# Altium PCB DS_ZK_2.0.PcbDoc
Units mil, origin at the board's own origin, x right, y up, seen from the top; angles counter-clockwise.
Board outline 4965.93 x 2367.42 mil, 2 copper layers (Top Layer, Bottom Layer); 180 components, 153 nets, 779 pads, 4 vias.
Unrouted connection lines stored in the file: 470.
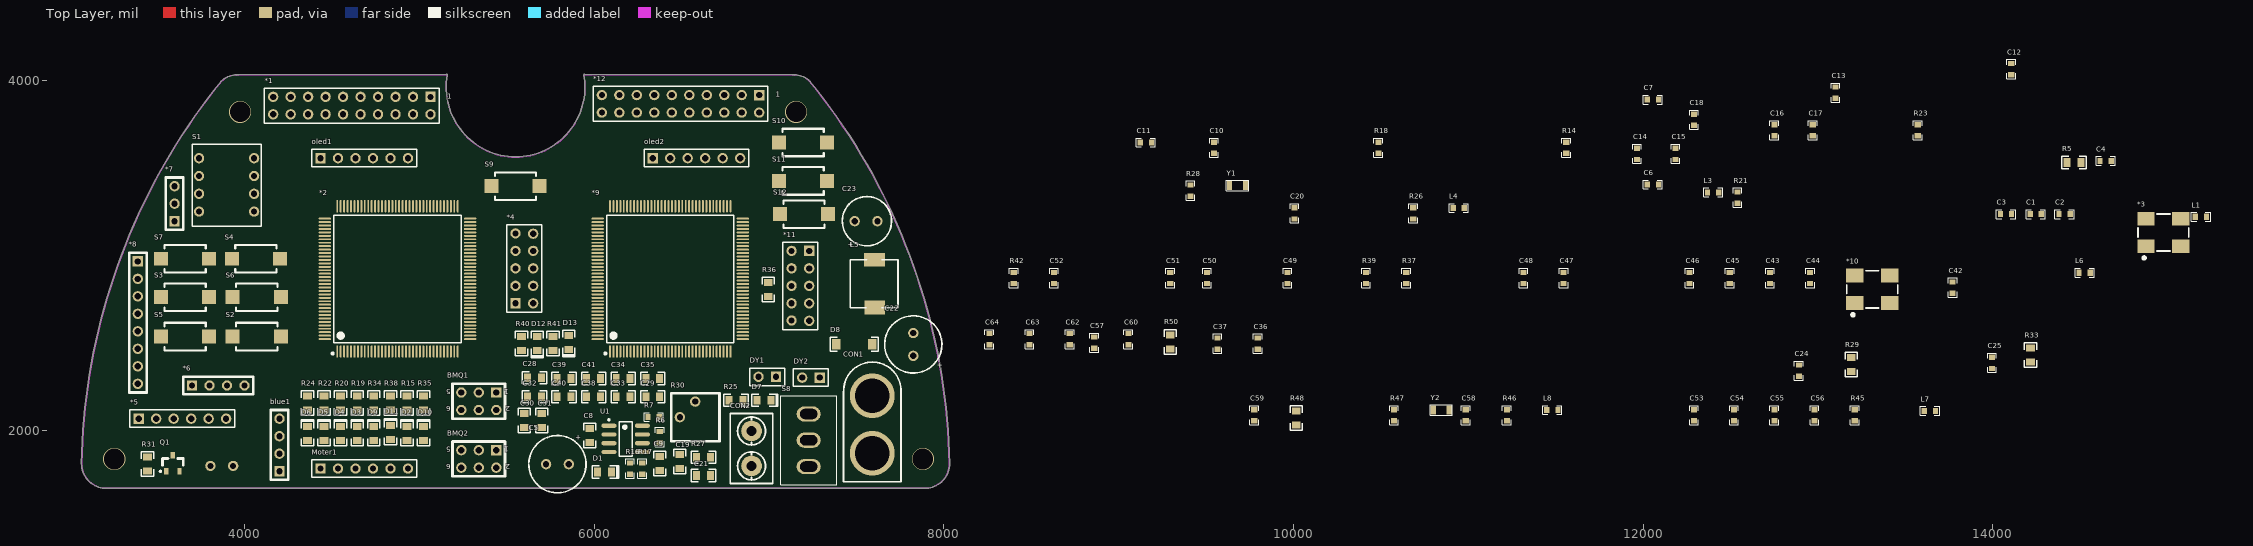
[diagram p0: Top Layer view]
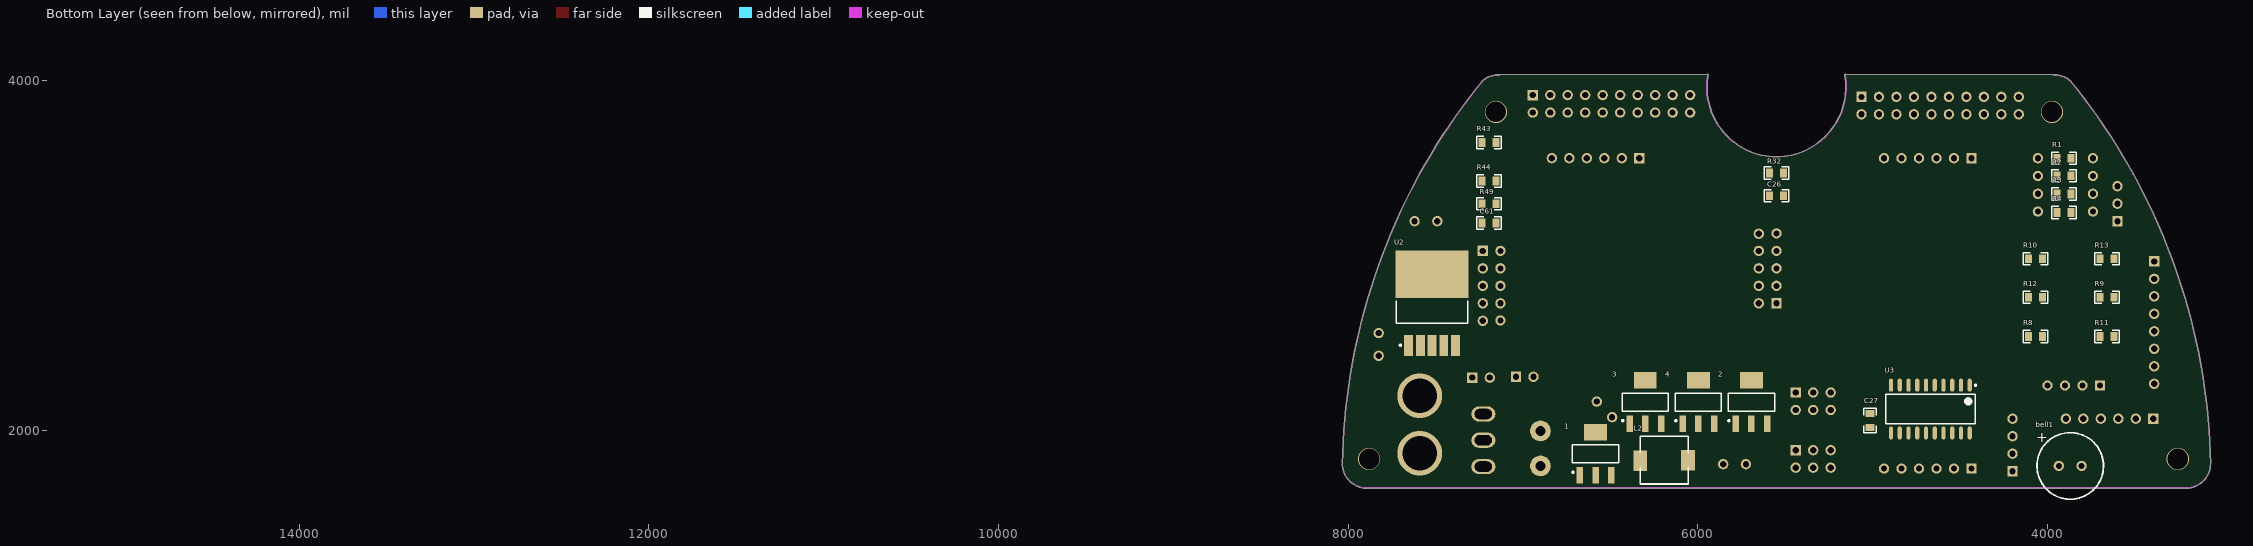
[diagram p1: Bottom Layer view, seen from below]

## Layer stack, top to bottom
Top Layer: signal copper 1.4
Dielectric: dielectric 12.6, FR-4, Dk 4.8
Bottom Layer: signal copper 1.4

## Board outline
3199.64,1667.51 3199.97,1667.51 ccw(c3207.53,1807.48) 3215.09,1667.51 5550.32,1667.48 7885.54,1667.51 ccw(c7893.1,1807.48) 7900.66,1667.51 7901,1667.51 ccw(c7901,1670.02) 7901.48,1667.55 ccw(c7893.1,1807.48) 8033.28,1806.92 ccw(c8030.77,1806.93) 8033.28,1806.93 ccw(c8030.77,1806.93) 8033.28,1806.97 ccw(c4458.04,1741.99) 7235.03,3994.74 ccw(c7232.81,3993.56) 7234.52,3995.41 ccw(c7138.46,3891.03) 7234.28,3995.62 ccw(c7138.46,3891.03) 7144.23,4032.77 ccw(c7144.08,4030.26) 7144.13,4032.77 ccw(c7144.08,4030.26) 7144.08,4032.77 7144.13,4032.77 ccw(c7138.46,3891.03) 7133.14,4032.78 5945.5,4034.24 ccw(c5944.02,4032.21) 5944.02,4034.72 ccw(c5944.02,4032.21) 5941.5,4032.15 5941.5,4031.72 ccw(c5944.02,4031.72) 5941.72,4030.69 cw(c5545.68,3963.89) 5947.32,3963.89 cw(c5545.68,3963.89) 5550.32,3562.28 ccw(c5554.95,3963.89) 5550.35,3562.28 5550.32,3562.28 cw(c5554.95,3963.89) 5158.91,4030.69 ccw(c5156.62,4031.72) 5159.13,4031.72 5159.13,4032.21 ccw(c5156.62,4032.21) 5156.62,4034.72 ccw(c5156.62,4032.21) 5155.13,4034.24 3967.49,4032.78 ccw(c3962.18,3891.03) 3956.5,4032.77 ccw(c3962.18,3891.03) 3956.4,4032.77 cw(c3956.55,4030.26) 3956.5,4032.77 cw(c3956.55,4030.26) 3956.55,4032.77 3956.4,4032.77 ccw(c3962.18,3891.03) 3866.35,3995.62 ccw(c3962.18,3891.03) 3866.11,3995.41 ccw(c3867.82,3993.56) 3865.6,3994.74 ccw(c6642.59,1741.99) 3067.35,1806.97 ccw(c3069.86,1806.93) 3067.35,1806.92 ccw(c3207.53,1807.48) 3199.16,1667.55 ccw(c3199.64,1670.02)

## Design rules (kind name [scope] priority, off if disabled: settings)
Clearance [All] p1: gap=8
ComponentClearance [All] p1 off: gap=10 collisioncheckmode=3 verticalgap=10 showdistances=FALSE
PolygonConnect [All] p1: connectstyle=Relief reliefconductorwidth=10 reliefentries=4 polygonreliefangle="90 Angle" airgapwidth=10
RoutingVias [All] p1: holewidth=15 width=30 viastyle="Through Hole" minholewidth=12 minwidth=24 maxholewidth=28 maxwidth=50
SolderMaskExpansion [All] p1: expansion=4
Width [All] p1: maxlimit=100 minlimit=10 preferedwidth=10
27 further rules are at their usual default settings.

## Components (designator, comment, footprint, x,y, rotation, side; value= is the part's Value field where it differs from the comment)
1 "AMS1117-adj" lm1117-5v 6590,1870 r90 bottom
2 "AMS1117-3.3" lm1117-5v 5698.33,2165 r90 bottom
3 "AMS1117-3.3" lm1117-5v 6305,2165 r90 bottom
4 "AMS1117-3.3" lm1117-5v 6001.67,2165 r90 bottom
*1 "SXT" SXT 4565,3860 r180 top
*2 "K66" LC-LQFP-144_20x20x05P 4875,2865 r0 top
*3 "晶振" LC-SMD-7050_4P 14975,3130 r0 top
*4 "JTAG" HDR2X5 5560,2900 r90 top
*5 "YK" HDR1X6 3395,2065 r0 top
*6 "6050" HDR1X4 3830,2275 r0 top
*7 "DJ" HDR1X3 3580,3305 r90 top
*8 "JG" HDR1X8 3430,2530 r270 top
*9 "K66" LC-LQFP-144_20x20x05P 6435,2865 r0 top
*10 "晶振" LC-SMD-7050_4P 13310,2805 r0 top
*11 "JTAG" HDR2X5 7220,2850 r270 top
*12 "SXT" SXT 6445,3870 r180 top
bell1 "Bell" bezzer 3975,1805 r180 bottom
blue1 "blueteeth2" HDR1X4 4180,1895 r90 top
BMQ1 "encode_1" HDR2X3 5250,2190 r180 top
BMQ2 "encode_2" HDR2X3 5250,1860 r180 top
C1 "Cap" 0603 14245,3235 r0 top
C2 "Cap" 0603 14410,3235 r0 top
C3 "Cap" 0603 14075,3235 r0 top
C4 "Cap" 0603 14645,3540 r0 top
C5 "470uF" 470UF 5775,1820 r180 top
C6 "Cap" 0603 12055,3405 r0 top
C7 "Cap" 0603 12055,3890 r0 top
C8 "470pF" 0805 5975,1970 r90 top
C9 "10uF" 0805 6375,1810 r270 top
C10 "Cap" 0603 9545,3615 r90 top
C11 "Cap" 0603 9155,3645 r0 top
C12 "Cap" 0603 14105,4065 r90 top
C13 "Cap" 0603 13100,3930 r90 top
C14 "Cap" 0603 11965,3580 r90 top
C15 "Cap" 0603 12185,3580 r90 top
C16 "Cap" 0603 12750,3715 r90 top
C17 "Cap" 0603 12970,3715 r90 top
C18 "Cap" 0603 12290,3775 r90 top
C19 "Cap" 0805 6490,1820 r90 top
C20 "Cap" 0603 10005,3240 r90 top
C21 "Cap" 0805 6625,1740 r0 top
C22 "Cap Pol1" 470uf 7840,2505 r90 top
C23 "Cap Pol1" 220uf 7580,3235 r0 top
C24 "Cap" 0603 12890,2340 r90 top
C25 "Cap" 0603 13995,2385 r90 top
C26 "Cap" 0805 5550,3340 r180 bottom
C27 "0.1uF" 0805 5015,2055 r90 bottom
C28 "Cap Pol1" 0805 5660,2300 r180 top
C29 "Cap Pol1" 0805 6335,2190 r0 top
C30 "Cap" 0805 5600,2055 r270 top
C31 "Cap" 0805 5700,2055 r270 top
C32 "Cap" 0805 5660,2190 r0 top
C33 "Cap" 0805 6166.25,2190 r180 top
C34 "Cap" 0805 6166.25,2295 r180 top
C35 "Cap" 0805 6335,2295 r180 top
C36 "Cap" 0603 9795,2495 r90 top
C37 "Cap" 0603 9565,2495 r90 top
C38 "Cap Pol1" 0805 5997.5,2190 r0 top
C39 "Cap" 0805 5828.75,2295 r0 top
C40 "Cap" 0805 5828.75,2190 r0 top
C41 "Cap" 0805 5997.5,2295 r180 top
C42 "Cap" 0603 13770,2815 r90 top
C43 "Cap" 0603 12725,2870 r90 top
C44 "Cap" 0603 12955,2870 r90 top
C45 "Cap" 0603 12495,2870 r90 top
C46 "Cap" 0603 12265,2870 r90 top
C47 "Cap" 0603 11545,2870 r90 top
C48 "Cap" 0603 11315,2870 r90 top
C49 "Cap" 0603 9965,2870 r90 top
C50 "Cap" 0603 9505,2870 r90 top
C51 "Cap" 0603 9295,2870 r90 top
C52 "Cap" 0603 8630,2870 r90 top
C53 "Cap" 0603 12290,2085 r90 top
C54 "Cap" 0603 12520,2085 r90 top
C55 "Cap" 0603 12750,2085 r90 top
C56 "Cap" 0603 12980,2085 r90 top
C57 "Cap" 0603 8860,2500 r270 top
C58 "Cap" 0603 10985,2085 r90 top
C59 "Cap" 0603 9775,2085 r90 top
C60 "Cap" 0603 9055,2520 r90 top
C61 "Cap" 0805 7195,3185 r180 bottom
C62 "Cap" 0603 8720,2520 r90 top
C63 "Cap" 0603 8490,2520 r90 top
C64 "Cap" 0603 8260,2520 r90 top
CON1 "PowerIn" DIZUO 7580,2025 r0 top
CON2 "PoweIn" KF301-2P 6900,1895 r0 top
D1 "IN5819" 0805LED 6060,1760 r0 top
D2 "LED0" 0805LED 4929.29,1980 r90 top
D3 "LED0" 0805LED 4644.64,1980 r90 top
D4 "LED0" 0805LED 4549.76,1980 r90 top
D5 "LED0" 0805LED 4454.88,1980 r90 top
D6 "LED0" 0805LED 4360,1980 r90 top
D7 "RED" 0805LED 6970,2170 r0 top
D8 "IN5824" 1N5824 7550,2645 r180 top
D9 "LED0" 0805LED 4739.52,1980 r90 top
D10 "LED0" 0805LED 5024.17,1980 r90 top
D11 "LED0" 0805LED 4834.4,1985 r90 top
D12 "LED0" 0805LED 5675,2495 r270 top
D13 "LED0" 0805LED 5855,2500 r270 top
DY1 "H1" HDR1X2 7020,2285 r180 top
DY2 "H1" HDR1X2 7270,2280 r180 top
L1 "Inductor" 0603 15190,3220 r0 top
L2 "330uH" diangan 6030,1905 r180 bottom
L3 "Inductor" 0603 12400,3360 r0 top
L4 "Inductor" 0603 10945,3270 r0 top
L5 "Inductor" diangan 7525,3000 r90 top
L6 "Inductor" 0603 14525,2900 r0 top
L7 "Inductor" 0603 13640,2110 r0 top
L8 "Inductor" 0603 11480,2115 r0 top
Moter1 "Motor" HDR1X6 4435,1780 r0 top
oled1 "OLED" HDR1X6 4435,3555 r0 top
oled2 "OLED" HDR1X6 6335,3555 r0 top
Q1 "NPN9013" npn9013 3580,1805 r90 top
R1 "Res2" 0805 3905,3555 r180 bottom
R2 "Res2" 0805 3905,3455 r180 bottom
R3 "Res2" 0805 3905,3350 r180 bottom
R4 "Res2" 0805 3905,3245 r0 bottom
R5 "Res2" 0805 14465,3530 r0 top
R6 "0.22R" 0603 6375,1960 r270 top
R7 "180R" 0603 6340,2075 r0 top
R8 "Res2" 0805 4070,2535 r180 bottom
R9 "Res2" 0805 3660,2760 r180 bottom
R10 "Res2" 0805 4070,2980 r180 bottom
R11 "Res2" 0805 3660,2535 r180 bottom
R12 "Res2" 0805 4070,2760 r180 bottom
R13 "Res2" 0805 3660,2980 r180 bottom
R14 "Res2" 0603 11560,3615 r90 top
R15 "Res2" 0805 4929.29,2155 r90 top
R16 "1.3K" 0603 6205,1780 r270 top
R17 "100R" 0603 6275,1780 r270 top
R18 "Res2" 0603 10485,3615 r90 top
R19 "Res2" 0805 4644.64,2155 r90 top
R20 "Res2" 0805 4549.76,2155 r90 top
R21 "Res2" 0603 12540,3330 r90 top
R22 "Res2" 0805 4454.88,2155 r90 top
R23 "Res2" 0603 13570,3715 r90 top
R24 "Res2" 0805 4360,2155 r90 top
R25 "Res2" 0805 6810,2170 r180 top
R26 "Res2" 0603 10685,3240 r90 top
R27 "Res2" 0805 6625,1845 r180 top
R28 "Res2" 0603 9410,3370 r90 top
R29 "Res2" 0805 13190,2375 r90 top
R30 "Res2" 1*2 6545,2105 r0 top
R31 "Res2" 0805 3445,1805 r270 top
R32 "Res2" 0805 5550,3470 r180 bottom
R33 "Res2" 0805 14215,2430 r90 top
R34 "Res2" 0805 4739.52,2155 r90 top
R35 "Res2" 0805 5024.17,2155 r90 top
R36 "Res2" 0805 6995,2805 r90 top
R37 "Res2" 0603 10645,2870 r90 top
R38 "Res2" 0805 4834.4,2155 r90 top
R39 "Res2" 0603 10415,2870 r90 top
R40 "Res2" 0805 5585,2495 r90 top
R41 "Res2" 0805 5765,2495 r90 top
R42 "Res2" 0603 8400,2870 r90 top
R43 "Res2" 0805 7195,3645 r0 bottom
R44 "Res2" 0805 7195,3425 r0 bottom
R45 "Res2" 0603 13210,2085 r90 top
R46 "Res2" 0603 11220,2085 r90 top
R47 "Res2" 0603 10575,2085 r90 top
R48 "Res2" 0805 10015,2070 r90 top
R49 "Res2" 0805 7195,3295 r180 bottom
R50 "Res2" 0805 9295,2505 r90 top
S1 "SW-DIP4" BMKG 3400,3510 r270 top
S2 "SW-PB" BUTTON 4110,2555 r0 top
S3 "SW-PB" BUTTON 3700,2780 r0 top
S4 "SW-PB" BUTTON 4105,3000 r0 top
S5 "SW-PB" BUTTON 3700,2555 r0 top
S6 "SW-PB" BUTTON 4110,2780 r0 top
S7 "SW-PB" BUTTON 3700,3000 r0 top
S8 "zk" SWITCH-MID 7105,1710 r90 top
S9 "SW-PB" BUTTON 5510,3375 r180 top
S10 "SW-PB" BUTTON 7155,3625 r180 top
S11 "SW-PB" BUTTON 7155,3405 r180 top
S12 "SW-PB" BUTTON 7160,3215 r180 top
U1 "MC34063" MC34063 6180,1950 r0 top
U2 "LM2596-5" LM2596 7510,2725 r90 bottom
U3 "74LS244" 74ls244DA 4640,2200 r270 bottom
Y1 "XTAL" 32.768 9735,3385 r0 top
Y2 "XTAL" 32.768 10900,2100 r0 top

## Footprints (in the part's own frame and the unit in brackets; to place one, negate y for a bottom-side part, rotate by r counter-clockwise, add the part's x,y. Pads: shape width x height; smd on the part's side, far side on the other; paste and mask are expansions set on the pad)
1*2 [mm]
  round 1.5 hole 0.9: 1(-1.397,-0.787) 2(0.838,1.473)
  silkscreen extent -2.67,-4.29 4.37,2.67
1N5824 [mil]
  rect 50x60 smd: 1(-40,155) 2(165,155)
  silkscreen extent -75,115 200,195
32.768 [mil]
  rect 29.53x51.18 smd: 1(-101,14) 2(-9,14)
  silkscreen extent -119,-16 9,44
74ls244DA [mm]
  oval 1.9x0.6 smd: 1(-1.443,4.953) 2(-1.443,3.683) 3(-1.443,2.413) 4(-1.443,1.143) 5(-1.443,-0.127) 6(-1.443,-1.397) 7(-1.443,-2.667) 8(-1.443,-3.937) 9(-1.443,-5.207) 10(-1.443,-6.477) 11(5.507,-6.477) 12(5.507,-5.207) 13(5.507,-3.937) 14(5.507,-2.667) 15(5.507,-1.397) 16(5.507,-0.127) 17(5.507,1.143) 18(5.507,2.413) 19(5.507,3.683) 20(5.507,4.953)
  silkscreen extent -1.57,-7.26 4.16,5.93, body extent -0.77,-7.26 4.83,5.74, height 2.2
220uf [mm]
  round 1.5 hole 0.9: 1(-2.286,-1.016) 2(1.016,-1.016)
  silkscreen extent -4.08,-4.59 3.07,2.56
470UF [mm]
  round 1.5 hole 0.9: 1(-2.032,0.381) 2(1.27,0.381)
  silkscreen extent -4.54,-3.78 3.78,4.54
470uf [mm]
  round 1.5 hole 0.9: 1(-2.032,0.381) 2(1.27,0.381)
  silkscreen extent -4.54,-3.78 3.78,4.54
0603 [mil]
  rect 30x35 smd: 1(-32,0) 2(32,0)
  silkscreen extent -55,-25 55,25
0805 [mil]
  rect 40x50 smd: 1(-40,0) 2(40,0)
  silkscreen extent -70,-35 70,35
0805LED [mil]
  rect 40x50 smd: 1(-40,0) 2(40,0)
  silkscreen extent -70,-35 80,35
bezzer [mm]
  round 1.5 hole 0.9: 1(1.016,-0.254) 2(4.318,-0.254)
  silkscreen extent -2.16,-5.08 7.5,4.58
BMKG [mm]
  round 1.5 hole 0.9: 1(-1.143,8.636) 2(1.439,8.636) 3(4.022,8.636) 4(6.604,8.636) 5(6.604,16.637) 6(4.022,16.637) 7(1.439,16.637) 8(-1.143,16.637)
  silkscreen extent -3.18,7.62 8.76,17.65
BUTTON [mil]
  rect 80x80 smd: 1(-177.8,-20) 2(97.8,-20)
  silkscreen extent -158,-99 78,59
diangan [mil]
  rect 78.74x118.11 smd: 1(-299,-80) 2(-26,-78)
  silkscreen extent -300,-213 -25,60
DIZUO [mm]
  round 6.5 hole 5: 1(0.279,4.343) 2(0.279,-3.988)
  silkscreen extent -3.91,-8.13 4.45,9.25
HDR1X2 [mm]
  rect 1.5x1.5 hole 0.9: 1(-0.508,-0.508)
  round 1.5 hole 0.9: 2(2.032,-0.508)
  silkscreen extent -1.78,-1.78 3.3,0.76
HDR1X3 [mm]
  rect 1.5x1.5 hole 0.9: 1(-2.794,-0.508)
  round 1.5 hole 0.9: 2(-0.254,-0.508) 3(2.286,-0.508)
  silkscreen extent -4.06,-1.78 3.56,0.76
HDR1X4 [mm]
  rect 1.5x1.5 hole 0.9: 1(-3.302,-0.508)
  round 1.5 hole 0.9: 2(-0.762,-0.508) 3(1.778,-0.508) 4(4.318,-0.508)
  silkscreen extent -4.57,-1.78 5.59,0.76
HDR1X6 [mm] "Connector; Header; 6 Position"
  rect 1.5x1.5 hole 0.9: 1(0,0)
  round 1.5 hole 0.9: 2(2.54,0) 3(5.08,0) 4(7.62,0) 5(10.16,0) 6(12.7,0)
  silkscreen extent -1.27,-1.27 13.97,1.27
HDR1X8 [mm]
  rect 1.5x1.5 hole 0.9: 1(-11.049,-1.016)
  round 1.5 hole 0.9: 2(-8.509,-1.016) 3(-5.969,-1.016) 4(-3.429,-1.016) 5(-0.889,-1.016) 6(1.651,-1.016) 7(4.191,-1.016) 8(6.731,-1.016)
  silkscreen extent -12.32,-2.29 8,0.25
HDR2X3 [mm]
  rect 1.5x1.5 hole 0.9: 1(-4.826,-0.635)
  round 1.5 hole 0.9: 2(-4.826,1.905) 3(-2.286,-0.635) 4(-2.286,1.905) 5(0.254,-0.635) 6(0.254,1.905)
  silkscreen extent -6.1,-1.91 1.52,3.18
HDR2X5 [mm]
  rect 1.5x1.5 hole 0.9: 1(-4.445,0.254)
  round 1.5 hole 0.9: 2(-1.905,0.254) 3(0.635,0.254) 4(3.175,0.254) 5(5.715,0.254) 6(5.664,-2.311) 7(3.175,-2.311) 8(0.635,-2.311) 9(-1.905,-2.311) 10(-4.445,-2.311)
  silkscreen extent -5.71,-3.58 6.98,1.52
KF301-2P [mm]
  round 3 hole 1.5: 1(0,-2.54) 2(0,2.54)
  silkscreen extent -3.1,-5.08 3.1,5.08
LC-LQFP-144_20x20x05P [mm]
  oval 0.28x1.8 smd mask+0.051: 1(-8.75,-10.55) 2(-8.25,-10.55) 3(-7.75,-10.55) 4(-7.25,-10.55) 5(-6.75,-10.55) 6(-6.25,-10.55) 7(-5.75,-10.55) 8(-5.25,-10.55) 9(-4.75,-10.55) 10(-4.25,-10.55) 11(-3.75,-10.55) 12(-3.25,-10.55) 13(-2.75,-10.55) 14(-2.25,-10.55) 15(-1.75,-10.55) 16(-1.25,-10.55) 17(-0.75,-10.55) 18(-0.25,-10.55) 19(0.25,-10.55) 20(0.75,-10.55) 21(1.25,-10.55) 22(1.75,-10.55) 23(2.25,-10.55) 24(2.75,-10.55) 25(3.25,-10.55) 26(3.75,-10.55) 27(4.25,-10.55) 28(4.75,-10.55) 29(5.25,-10.55) 30(5.75,-10.55) 31(6.25,-10.55) 32(6.75,-10.55) 33(7.25,-10.55) 34(7.75,-10.55) 35(8.25,-10.55) 36(8.75,-10.55) 73(8.75,10.55) 74(8.25,10.55) 75(7.75,10.55) 76(7.25,10.55) 77(6.75,10.55) 78(6.25,10.55) 79(5.75,10.55) 80(5.25,10.55) 81(4.75,10.55) 82(4.25,10.55) 83(3.75,10.55) 84(3.25,10.55) 85(2.75,10.55) 86(2.25,10.55) 87(1.75,10.55) 88(1.25,10.55) 89(0.75,10.55) 90(0.25,10.55) 91(-0.25,10.55) 92(-0.75,10.55) 93(-1.25,10.55) 94(-1.75,10.55) 95(-2.25,10.55) 96(-2.75,10.55) 97(-3.25,10.55) 98(-3.75,10.55) 99(-4.25,10.55) 100(-4.75,10.55) 101(-5.25,10.55) 102(-5.75,10.55) 103(-6.25,10.55) 104(-6.75,10.55) 105(-7.25,10.55) 106(-7.75,10.55) 107(-8.25,10.55) 108(-8.75,10.55)
  oval 1.8x0.28 smd mask+0.051: 37(10.55,-8.75) 38(10.55,-8.25) 39(10.55,-7.75) 40(10.55,-7.25) 41(10.55,-6.75) 42(10.55,-6.25) 43(10.55,-5.75) 44(10.55,-5.25) 45(10.55,-4.75) 46(10.55,-4.25) 47(10.55,-3.75) 48(10.55,-3.25) 49(10.55,-2.75) 50(10.55,-2.25) 51(10.55,-1.75) 52(10.55,-1.25) 53(10.55,-0.75) 54(10.55,-0.25) 55(10.55,0.25) 56(10.55,0.75) 57(10.55,1.25) 58(10.55,1.75) 59(10.55,2.25) 60(10.55,2.75) 61(10.55,3.25) 62(10.55,3.75) 63(10.55,4.25) 64(10.55,4.75) 65(10.55,5.25) 66(10.55,5.75) 67(10.55,6.25) 68(10.55,6.75) 69(10.55,7.25) 70(10.55,7.75) 71(10.55,8.25) 72(10.55,8.75) 109(-10.55,8.75) 110(-10.55,8.25) 111(-10.55,7.75) 112(-10.55,7.25) 113(-10.55,6.75) 114(-10.55,6.25) 115(-10.55,5.75) 116(-10.55,5.25) 117(-10.55,4.75) 118(-10.55,4.25) 119(-10.55,3.75) 120(-10.55,3.25) 121(-10.55,2.75) 122(-10.55,2.25) 123(-10.55,1.75) 124(-10.55,1.25) 125(-10.55,0.75) 126(-10.55,0.25) 127(-10.55,-0.25) 128(-10.55,-0.75) 129(-10.55,-1.25) 130(-10.55,-1.75) 131(-10.55,-2.25) 132(-10.55,-2.75) 133(-10.55,-3.25) 134(-10.55,-3.75) 135(-10.55,-4.25) 136(-10.55,-4.75) 137(-10.55,-5.25) 138(-10.55,-5.75) 139(-10.55,-6.25) 140(-10.55,-6.75) 141(-10.55,-7.25) 142(-10.55,-7.75) 143(-10.55,-8.25) 144(-10.55,-8.75)
  silkscreen extent -9.57,-11 9.25,9.25
LC-SMD-7050_4P [mm]
  rect 2.5x2 smd: 1(-2.54,-2) 2(2.54,-2) 3(2.54,2) 4(-2.54,2)
  silkscreen extent -3.7,-3.9 3.7,2.7
lm1117-5v [mm]
  rect 2.4x0.95 smd: 1(-3.277,2.173) 2(-3.277,-0.127) 3(-3.277,-2.427)
  rect 2.4x3.3 smd: 2(3.023,-0.127)
  silkscreen extent -2.95,-3.48 1.17,3.28, body extent -1.63,-3.48 1.37,3.22, height 1.8
LM2596 [mm]
  rect 3.05x1.3 smd: 1(-6.1,3.654) 2(-6.1,1.954) 3(-6.1,0.254) 4(-6.1,-1.446) 5(-6.1,-3.146)
  rect 6.9x10.65 smd: 6(4.25,0.254)
  silkscreen extent -6.22,-4.95 0.4,5.45
MC34063 [mm] "SOIC, 8-Leads, Body 4.90x3.90mm, Pitch 1.27mm, IPC Medium Density"
  oval 2.2x0.6 smd: 1(-2.425,1.905) 2(-2.425,0.635) 3(-2.425,-0.635) 4(-2.425,-1.905) 5(2.425,-1.905) 6(2.425,-0.635) 7(2.425,0.635) 8(2.425,1.905)
  silkscreen extent -2.55,-2.5 0.93,2.88, body extent -2,-2.5 2,2.5, height 1.5
npn9013 [mm]
  rect 0.95x0.6 smd: 1(-1.048,-1.204) 2(-1.048,0.696) 3(1.302,-0.254)
  silkscreen extent -1.17,-1.75 0.83,1.67, body extent -0.57,-1.75 0.83,1.25, height 1.1
SWITCH-MID [mm]
  oval 2.2x3.5 hole 1.5 slot 2.5 at 90 deg: 1(9.703,-3.099) 2(5.893,-3.099) ""(2.057,-3.099)
  silkscreen extent -0.56,-7.16 12.34,0.94
SXT [mm]
  rect 1.5x1.5 hole 0.9: 1(-12.675,-1.168)
  round 1.5 hole 0.9: 2(-10.135,-1.168) 3(-7.595,-1.168) 4(-5.055,-1.168) 5(-2.515,-1.168) 6(0.025,-1.168) 7(2.565,-1.168) 8(5.105,-1.168) 9(7.645,-1.168) 10(10.185,-1.168) 11(10.185,1.372) 12(7.645,1.372) 13(5.105,1.372) 14(2.565,1.372) 15(0.025,1.372) 16(-2.515,1.372) 17(-5.055,1.372) 18(-7.595,1.372) 19(-10.135,1.372) 20(-12.675,1.372)
  silkscreen extent -13.94,-2.44 11.46,2.64

## Part data
1 2 3 4: library part LT1117-3.3
*1 *12: library part 摄像头
*5: library part 遥控
*7: library part 舵机
*8: library part 激光
bell1: "Electrical Bell"
blue1: library part blueteeth
BMQ1 BMQ2: library part encode
C1 C2 C3 C4 C6 C7 C10 C11 C12 C13 C14 C15 C16 C17 C18 C19 C20 C21 C24 C25 C26 C30 C31 C32 C33 C34 C35 C36 C37 C39 C40 C41 C42 C43 C44 C45 C46 C47 C48 C49 C50 C51 C52 C53 C54 C55 C56 C57 C58 C59 C60 C61 C62 C63 C64: "Capacitor"
C5 C9: library part "Cap Pol3", "Polarized Capacitor (Surface Mount)"
C8 C27: library part "Cap Semi", "Capacitor (Semiconductor SIM Model)"
C22 C23 C28 C29 C38: "Polarized Capacitor (Radial)"
CON1 CON2: library part "Header 2", "Header, 2-Pin"
D1: library part Diode, "Default Diode"
D2 D3 D4 D5 D6 D9 D10 D11 D12 D13: "Typical INFRARED GaAs LED"
D7: library part LED2, "Typical RED, GREEN, YELLOW, AMBER GaAs LED"
L2: library part Inductor, "Inductor"
Q1: library part 2N3904, "NPN General Purpose Amplifier"
R1 R2 R3 R4 R5 R8 R9 R10 R11 R12 R13 R14 R15 R18 R19 R20 R21 R22 R23 R24 R25 R26 R27 R28 R29 R30 R31 R32 R33 R34 R35 R36 R37 R38 R39 R40 R41 R42 R43 R44 R45 R46 R47 R48 R49 R50: "Resistor"
R6 R7 R16 R17: library part Res2, "Resistor"
S1: "DIP Switch"
S2 S3 S4 S5 S6 S7 S10 S11: "Switch"
S8: library part SW-SPST, "Single-Pole, Single-Throw Switch"
S9 S12: "按键"
U2: library part LM2596
Y1 Y2: "Crystal Oscillator"

## Via types
v1: diameter 125.98, hole 118.11, Top Layer to Bottom Layer, 4 vias

## Nets (pads, with @x,y where several pads share a name; then routed paths per layer and width w, separated by ;. In a path a pad name is that pad's centre, name@x,y a point inside that pad or via, vN(x,y) a via of type N, cw(c..) or ccw(c..) an arc to the next point about the centre after c; other vN are vias at no path point)
3V3-1: 3.2 *2.5 *2.16 *2.43 *2.56 *2.70 *2.94 *2.108 *2.122 *2.135 *4.10 C3.1 C4.2 C6.2 C7.1 C13.1 C25.1 C29.1 C35.2 C36.1 C37.1 C42.1 D2.1 D3.1 D4.1 D5.1 D6.1 L1.1 L3.1 R5.2 R14.1 R18.1 R23.1 R32.1
3V3-2: 4.2 *9.5 *9.16 *9.43 *9.70 *9.94 *9.108 *9.122 *9.135 *11.10 C38.1 C41.2 C45.1 C46.2 C47.2 C52.1 C60.1 C62.1 C63.1 C64.1 D11.1 D12.1 D13.1 L6.1 L7.1 L8.1 R36.2 R37.1 R39.1 R43.2 R44.2 R45.1 R49.1
3V3-3: 2.2 bell1.1 C28.1 C32.2 D9.1 R1.2 R2.2 R3.2 R4.1 R8.2 R9.2 R10.2 R11.2 R12.2 R13.2
5V: 2.3 3.3 4.3 *1.20 *5.2 *6.1 *8.1 *12.20 blue1.1 BMQ1.2 BMQ2.2 C23.1 C27.2 C30.2 C31.2 C33.2 C34.2 C39.2 C40.2 D10.1 DY2.2 L5.2 oled1.2 oled2.2 U2.4 U3.20
6V: 1.2 *7.2 C19.2 R27.2
7V2: 1.3 C9.1 C21.2 C22.1 CON2.1 DY1.2 R6.2 R25.2 S8.2 U1.6 U2.1
12V: C5.1 D1.2 Moter1.5 R16.2
CLKOUT: *2.72 *3.3
CLKOUT-2: *9.72 *10.3
EXTAL33: *2.41 C24.2 R28.1 Y1.2
EXTAL33-2: *9.41 C59.2 R47.1 Y2.2
GND: 2.1 3.1 4.1 *1.11 *2.6 *2.17 *2.18 *2.44 *2.57 *2.71 *2.93 *2.107 *2.121 *2.134 *3.2 *4.5 *5.1 *6.2 *7.1 *8.2 *9.6 *9.17 *9.18 *9.44 *9.57 *9.71 *9.93 *9.107 *9.121 *9.134 *10.2 *11.5 *12.11 blue1.2 BMQ1.1 BMQ2.1 C1.1 C2.1 C3.2 C4.1 C5.2 C6.1 C7.2 C8.2 C9.2 C10.1 C11.1 C12.1 C13.2 C18.1 C19.1 C20.1 C21.1 C22.2 C23.2 C24.1 C25.2 C26.1 C27.1 C28.2 C29.2 C30.1 C31.1 C32.1 C33.1 C34.1 C35.1 C36.2 C37.2 C38.2 C39.1 C40.1 C41.1 C42.2 C43.1 C44.1 C45.2 C46.1 C47.1 C48.2 C49.1 C50.1 C51.1 C52.2 C57.1 C58.1 C59.1 C60.2 C61.1 C62.2 C63.2 C64.2 CON1.2 CON2.2 D7.2 D8.2 DY1.1 DY2.1 L4.1 Moter1.6 oled1.1 oled2.1 Q1.1 R15.2 R17.2 R29.2 R30.1 R33.1 R34.2 R35.2 R38.2 R48.2 R50.1 S1.1 S1.2 S1.3 S1.4 S2.1 S3.1 S4.1 S5.1 S6.1 S7.1 S9.1 S10.1 S11.1 S12.1 U1.2 U1.4 U2.3 U2.5 U2.6 U3.1 U3.3 U3.5 U3.7 U3.9 U3.10 U3.11 U3.13 U3.15 U3.17 U3.19
"MOTOR1 IN1": Moter1.1 U3.18
"MOTOR1 IN2": Moter1.2 U3.16
"MOTOR1 IN3": Moter1.3 U3.14
"MOTOR1 IN4": Moter1.4 U3.12
Net1_1: 1.1 R27.1 R30.2
Net*2_21: *2.21 C10.2 C12.2 R14.2
Net*2_22: *2.22 C11.2 R18.2
Net*2_31: *2.31 R21.2
Net*2_32: *2.32 C14.2 C15.2 C16.2 C17.2 L3.2 R21.1
Net*2_33: *2.33 C14.1 C15.1 C16.1 C17.1 L4.2 R26.1
Net*2_34: *2.34 R26.2
Net*2_42: *2.42 C18.2 R23.2
Net*3_4: *3.4 C1.2 C2.2 L1.2
Net*9_21: *9.21 C49.2 C51.2 R37.2
Net*9_22: *9.22 C50.2 R39.2
Net*9_31: *9.31 R42.2
Net*9_32: *9.32 C53.2 C54.2 C55.2 C56.2 L7.2 R42.1
Net*9_33: *9.33 C53.1 C54.1 C55.1 C56.1 L8.2 R46.1
Net*9_34: *9.34 R46.2
Net*9_42: *9.42 C57.2 R45.2
Net*9_56: *9.56 C48.1
Net*10_4: *10.4 C43.2 C44.2 L6.2
Netbell1_2: bell1.2 Q1.3
NetC8_1: C8.1 U1.3
NetCON1_1: CON1.1 S8.1
NetD1_1: D1.1 L2.2 U1.1
NetD2_2: D2.2 R15.1
NetD3_2: D3.2 R19.1
NetD4_2: D4.2 R20.1
NetD5_2: D5.2 R22.1
NetD6_2: D6.2 R24.1
NetD7_1: D7.1 R25.1
NetD8_1: D8.1 L5.1 U2.2
NetD9_2: D9.2 R34.1
NetD10_2: D10.2 R35.1
NetD11_2: D11.2 R38.1
NetD12_2: D12.2 R40.1
NetD13_2: D13.2 R41.1
NetL2_1: L2.1 R6.1 R7.2 U1.7
NetQ1_2: Q1.2 R31.2
NetR7_1: R7.1 U1.8
NetR16_1: R16.1 R17.1 U1.5
PTA0: *2.50 *4.6
PTA0-2: *9.50 *11.6
PTA1: *2.51 *4.8
PTA1-2: *9.51 *11.8
PTA2: *2.52 *4.3
PTA2-2: *9.52 *11.3
PTA3: *2.53 *4.7
PTA3-2: *9.53 *11.7
PTA4: *2.54 *4.9 R5.1
PTA4-2: *9.54 *11.9 R36.1
PTA7: *2.59
PTA8: *2.60
PTA10: *2.62 BMQ2.3
PTA11: *2.63 BMQ2.4
PTA12: *2.64 BMQ1.3
PTA13: *2.65 BMQ1.4
PTA14: *2.66 *5.3
PTA15: *2.67 *5.4
PTA16: *2.68 *5.5
PTA17: *2.69 *5.6
PTA19: *2.73 oled1.6
PTA19-2: *9.73 oled2.6
PTA24: *2.75 oled1.5
PTA24-2: *9.75 oled2.5
PTA25: *1.10 *2.76
PTA25-2: *9.76 *12.10
PTA26: *1.9 *2.77
PTA26-2: *9.77 *12.9
PTA27: *1.17 *2.78 R29.1
PTA27-2: *9.78 *12.17 R48.1
PTA29: *1.15 *2.80 *12.15 R33.2
PTA29-2: *9.80 R50.2
PTB0: *1.1 *2.81
PTB0-2: *9.81 *12.1
PTB1: *1.2 *2.82
PTB1-2: *9.82 *12.2
PTB2: *1.3 *2.83
PTB2-2: *9.83 *12.3
PTB3: *1.4 *2.84
PTB3-2: *9.84 *12.4
PTB4: *1.5 *2.85
PTB4-2: *9.85 *12.5
PTB5: *1.6 *2.86
PTB5-2: *9.86 *12.6
PTB6: *1.7 *2.87
PTB6-2: *9.87 *12.7
PTB7: *1.8 *2.88
PTB7-2: *9.88 *12.8
PTB10: *2.91
PTB11: *2.92
PTB16: *2.95 R1.1 S1.8
PTB17: *2.96 R2.1 S1.7
PTB18: *2.97 R3.1 S1.6
PTB19: *2.98 R4.2 S1.5
PTB21: *2.100 oled1.3
PTB21-2: *9.100 oled2.3
PTB22: *2.101 oled1.4
PTB22-2: *9.101 oled2.4
PTC0: *2.103
PTC1: *2.104
PTC2: *2.105 *7.3
PTC4: *2.109 *8.3
PTC5: *2.110 *8.4
PTC6: *2.111 *8.5
PTC7: *2.112 *8.6
PTC8: *2.113 *8.7
PTC9: *2.114 *8.8
PTC11: *2.116 R13.1 S7.2
PTC12: *2.117 R10.1 S4.2
PTD1: *2.128 R9.1 S3.2
PTD2: *2.129 R12.1 S6.2
PTD7: *2.136
PTD8: *2.137
PTD9: *2.138
PTD10: *2.139 R8.1 S2.2
PTD11: *2.140 R11.1 S5.2
PTD12: *2.141 R19.2
PTD13: *2.142 R20.2
PTD14: *2.143 R22.2
PTD14-2: *9.143 R41.2
PTD15: *2.144 R24.2
PTD15-2: *9.144 R40.2
PTE0: *2.1 *6.4
PTE1: *2.2 *6.3
PTE2: *2.3 R31.1
PTE5: *2.8 U3.2
PTE6: *2.9 U3.4
PTE7: *2.10 U3.6
PTE8: *2.11 blue1.4
PTE9: *2.12 blue1.3
PTE10: *2.13 U3.8
PTE24: *2.45
PTE25: *2.46
PTE26-2: *9.47 R44.1 S11.2
PTE27-2: *9.48 R43.1 S10.2
RESET: *2.74 *4.2 C26.2 R32.2 S9.2
RESET-2: *9.74 *11.2 C61.2 R49.2 S12.2
XTAL32: *2.40 C20.2 R28.2 Y1.1
XTAL32-2: *9.40 C58.2 R47.2 Y2.1
pads on no net: *1.12 *1.13 *1.14 *1.16 *1.18 *1.19 *2.4 *2.7 *2.14 *2.15 *2.19 *2.20 *2.23 *2.24 *2.25 *2.26 *2.27 *2.28 *2.29 *2.30 *2.35 *2.36 *2.37 *2.38 *2.39 *2.47 *2.48 *2.49 *2.55 *2.58 *2.61 *2.79 *2.89 *2.90 *2.99 *2.102 *2.106 *2.115 *2.118 *2.119 *2.120 *2.123 *2.124 *2.125 *2.126 *2.127 *2.130 *2.131 *2.132 *2.133 *3.1 *4.1 *4.4 *9.1 *9.2 *9.3 *9.4 *9.7 *9.8 *9.9 *9.10 *9.11 *9.12 *9.13 *9.14 *9.15 *9.19 *9.20 *9.23 *9.24 *9.25 *9.26 *9.27 *9.28 *9.29 *9.30 *9.35 *9.36 *9.37 *9.38 *9.39 *9.45 *9.46 *9.49 *9.55 *9.58 *9.59 *9.60 *9.61 *9.62 *9.63 *9.64 *9.65 *9.66 *9.67 *9.68 *9.69 *9.79 *9.89 *9.90 *9.91 *9.92 *9.95 *9.96 *9.97 *9.98 *9.99 *9.102 *9.103 *9.104 *9.105 *9.106 *9.109 *9.110 *9.111 *9.112 *9.113 *9.114 *9.115 *9.116 *9.117 *9.118 *9.119 *9.120 *9.123 *9.124 *9.125 *9.126 *9.127 *9.128 *9.129 *9.130 *9.131 *9.132 *9.133 *9.136 *9.137 *9.138 *9.139 *9.140 *9.141 *9.142 *10.1 *11.1 *11.4 *12.12 *12.13 *12.14 *12.16 *12.18 *12.19 BMQ1.5 BMQ1.6 BMQ2.5 BMQ2.6 S8.
copper on no net:
  other v1: 3255,1835 7880,1835 3975,3820 7155,3820

## Keep-outs
Keep-Out Layer:
  lines w5: 3199.64,1670.02 5550.32,1670 7901,1670.02 ; 3215.01,1670.02 cw(c3207.53,1807.48) 3069.86,1806.93 cw(c6642.59,1741.99) 3868.05,3993.77 ; 3867.82,3993.56 cw(c3962.18,3891.03) 3967.46,4030.27 ; 3956.55,4030.26 5156.62,4031.72 5156.62,4032.21 ccw(c5554.95,3963.89) 5550.32,3559.76 ccw(c5545.68,3963.89) 5944.02,4032.21 ; 5944.02,4031.72 7144.08,4030.26 ; 7133.18,4030.27 cw(c7138.46,3891.03) 7232.81,3993.56 ; 7232.59,3993.77 cw(c4458.04,1741.99) 8030.77,1806.93 cw(c7893.1,1807.48) 7885.62,1670.02

## Text inside footprints (layer, text, board x,y; h text height)
*1: Top Overlay "1" at 5159,3896 h30
*12: Top Overlay "1" at 7039,3906 h30
bell1: Bottom Overlay "+" at 4065,1930 h59.06
BMQ1: Top Overlay "6" at 5180,2135 h30 r180; Top Overlay "5" at 5180,2235 h30 r180; Top Overlay "2" at 5520,2135 h30 r180; Top Overlay "1" at 5510,2235 h30 r180
BMQ2: Top Overlay "6" at 5180,1805 h30 r180; Top Overlay "5" at 5180,1905 h30 r180; Top Overlay "2" at 5520,1805 h30 r180; Top Overlay "1" at 5510,1905 h30 r180
C5: Top Overlay "+" at 5925,1970 h30 r180
C22: Top Overlay "+" at 7990,2355 h30 r90
C23: Top Overlay "+" at 7450,3050 h30